# EAGLE board RemovingGround (EAGLE 6.5.0)
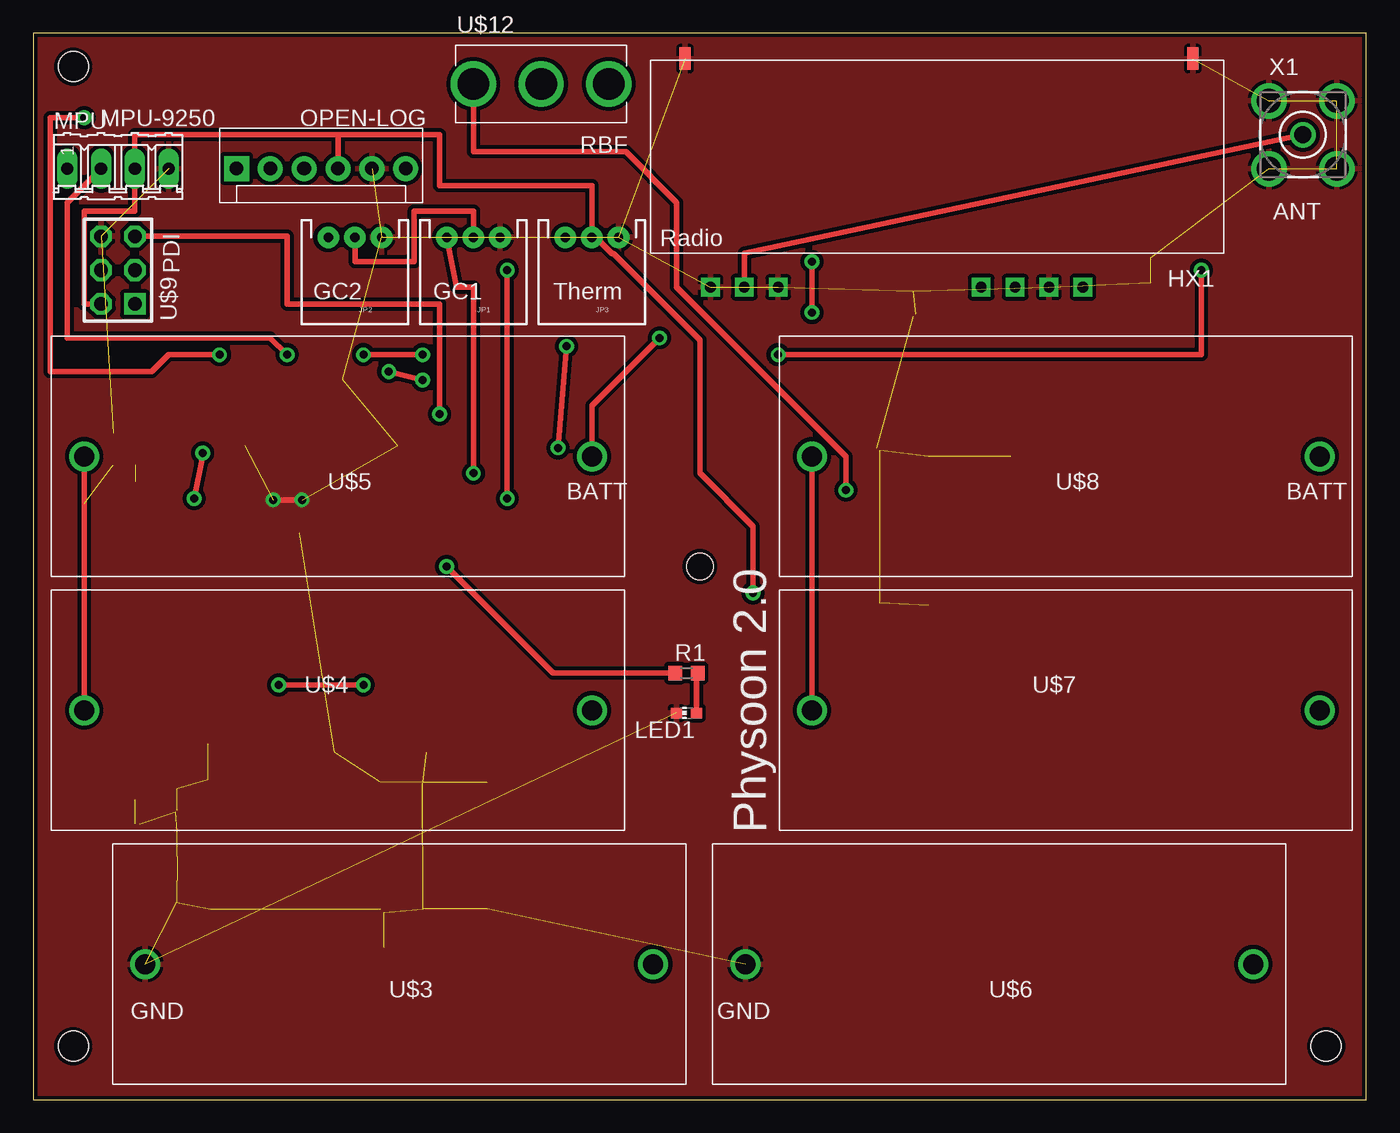
[diagram p0: board, top side]
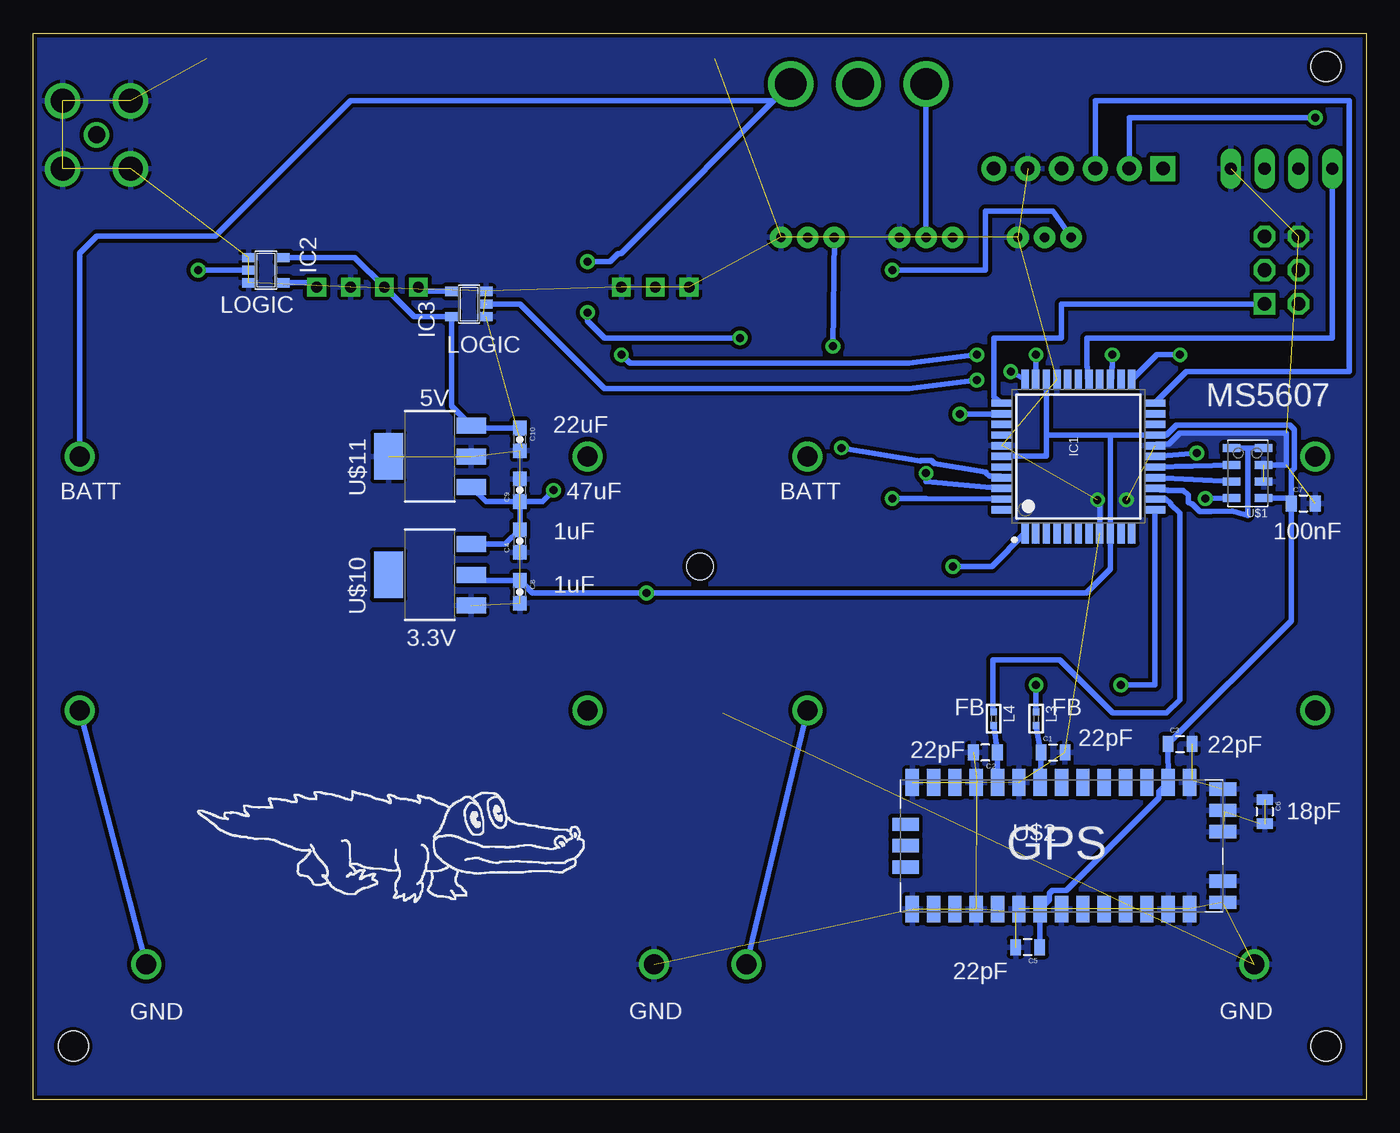
[diagram p1: board, bottom side, seen from below]

Size 100 x 80 mm. Coordinates in mm from the lower left corner, seen from the top.
Outline: 0,0 100,0 100,80 0,80 0,0
Copper layers (1*16): Top 0.035mm / dielectric 1.5mm / Bottom 0.035mm
Design rules "SparkFun": minimum track width 8mil, minimum drill 20mil, track to track 8mil, track to pad 8mil, pad to pad 8mil, via to via 8mil, smd to smd 8mil, copper to edge 8mil, drill to drill 8mil, minimum pad ring 12mil, minimum via ring 10mil, stop-mask expansion 4mil, vias tented up to drill 20mil, thermal gap 10mil
Holes 2.26 mm at 3,4 97,4 3,77.5
Holes 2 mm at 50,40

## Footprints (pad centres in the part's own frame; a part is rotated, then mirrored left to right if it is on the bottom)
0805 = smd 0.8 x 1.2: 1 -0.9,0; 2 0.9,0
0603-CAP = smd 1.1 x 1: 1 -0.85,0; 2 0.85,0
QFP80P1200X1200X120-44N = smd 1.55 x 0.55: 1 -5.75,4; 2 -5.75,3.2; 3 -5.75,2.4; 4 -5.75,1.6; 5 -5.75,0.8; 6 -5.75,0; 7 -5.75,-0.8; 8 -5.75,-1.6; 9 -5.75,-2.4; 10 -5.75,-3.2; 11 -5.75,-4; 23 5.75,-4; 24 5.75,-3.2; 25 5.75,-2.4; 26 5.75,-1.6; 27 5.75,-0.8; 28 5.75,0; 29 5.75,0.8; 30 5.75,1.6; 31 5.75,2.4; 32 5.75,3.2; 33 5.75,4 | smd 0.55 x 1.55: 12 -4,-5.75; 13 -3.2,-5.75; 14 -2.4,-5.75; 15 -1.6,-5.75; 16 -0.8,-5.75; 17 0,-5.75; 18 0.8,-5.75; 19 1.6,-5.75; 20 2.4,-5.75; 21 3.2,-5.75; 22 4,-5.75; 34 4,5.75; 35 3.2,5.75; 36 2.4,5.75; 37 1.6,5.75; 38 0.8,5.75; 39 0,5.75; 40 -0.8,5.75; 41 -1.6,5.75; 42 -2.4,5.75; 43 -3.2,5.75; 44 -4,5.75
SOT23-5 = smd 0.69 x 0.99: 1 -0.95,-1.29; 2 0,-1.29; 3 0.95,-1.29; 4 0.95,1.3; 5 -0.95,1.3
JST-3-PTH = drill 0.7 pad 1.626: 1 -2,-5; 2 0,-5; 3 2,-5
MOLEX-1X6 = drill 1.016 pad 1.88 square: 1 0,0 | drill 1.016 pad 1.88: 2 2.54,0; 3 5.08,0; 4 7.62,0; 5 10.16,0; 6 12.7,0
L0402 = smd 0.5 x 0.5: 1 -0.508,0; 2 0.508,0
CHIP-LED0603 = smd 0.8 x 0.8: A 0,-0.75; C 0,0.75
HX1 = drill 0.8 square: 0V 25.4,-8.89; EN 20.32,-8.89; RFGND1 0,-8.89; RFGND2 5.08,-8.89; RFOUT 2.54,-8.89; TXD 27.94,-8.89; VCC 22.86,-8.89 | smd 0.813 x 1.676: BODYGND1 -1.905,8.255; BODYGND2 36.195,8.255
04P = drill 0.914 long: 1 -3.81,0; 2 -1.27,0; 3 1.27,0; 4 3.81,0
R0603 = smd 1 x 1.1: 1 -0.85,0; 2 0.85,0
MS5611-01BA01 = smd 1.3 x 0.6: 1 -1.2,1.875; 2 -1.2,0.625; 3 -1.2,-0.625; 4 -1.2,-1.875; 5 1.2,-1.875; 6 1.2,-0.625; 7 1.2,0.625; 8 1.2,1.875
M10382-A1 = smd 1 x 2: 1 -1.05,12.1; 2 -2.65,12.1; 3 -4.25,12.1; 18 -1.6,-11.7; 19 0,-11.7; 20 1.6,-11.7; 35 4.25,12.1; 36 2.65,12.1 | smd 2 x 1: 4 -4.75,9.6; 5 -4.75,8; 6 -4.75,6.4; 7 -4.75,4.8; 8 -4.75,3.2; 9 -4.75,1.6; 10 -4.75,0; 11 -4.75,-1.6; 12 -4.75,-3.2; 13 -4.75,-4.8; 14 -4.75,-6.4; 15 -4.75,-8; 16 -4.75,-9.6; 17 -4.75,-11.2; 21 4.75,-11.2; 22 4.75,-9.6; 23 4.75,-8; 24 4.75,-6.4; 25 4.75,-4.8; 26 4.75,-3.2; 27 4.75,-1.6; 28 4.75,0; 29 4.75,1.6; 30 4.75,3.2; 31 4.75,4.8; 32 4.75,6.4; 33 4.75,8; 34 4.75,9.6
CR-123-A_HOLDER = drill 1.5: + -19.05,0; - 19.05,0
AVR-ISP-6 = drill 1.016 square: 1 -2.54,-1.27 | drill 1.016 octagon: 2 -2.54,1.27; 3 0,-1.27; 4 0,1.27; 5 2.54,-1.27; 6 2.54,1.27
SOT-223 = smd 1.2 x 2.2: 1 -2.3,1.1; 2 0,1.1; 3 2.3,1.1 | smd 3.5 x 2.2: 4 0,7.3
ZMCHFL3R = drill 2.375: 1 -5.08,0; 2 0,0; 3 5.08,0
BU-SMA-V = drill 1.27: 1 0,0 | drill 1.778: 2 -2.55,2.55; 3 2.55,2.55; 4 2.55,-2.55; 5 -2.55,-2.55

## Placement (x,y rotation side)
C1  22pF  [0805]  23.5,26.04 0 bottom
C2  22pF  [0805]  28.57,26.04 180 bottom
C3  22pF  [0805]  13.97,26.67 0 bottom
C4  1uF  [0603-CAP]  63.5,41.91 90 bottom
C5  22pF  [0805]  25.4,11.43 180 bottom
C6  18pF  [0805]  7.62,21.59 270 bottom
C7  100nF  [0805]  4.71,44.72 0 bottom
C8  1uF  [0603-CAP]  63.5,38.1 270 bottom
C9  .47uF  [0603-CAP]  63.5,45.72 90 bottom
C10  22uF  [0603-CAP]  63.5,49.53 270 bottom
IC1  [QFP80P1200X1200X120-44N]  21.59,48.26 90 bottom
IC2  74AHC1G125DBV  [SOT23-5]  82.55,62.23 270 bottom
IC3  74AHC1G125DBV  [SOT23-5]  67.31,59.69 90 bottom
JP1  [JST-3-PTH]  33.02,59.69 180 top
JP2  [JST-3-PTH]  24.13,59.69 180 top
JP3  [JST-3-PTH]  41.91,59.69 180 top
JP4  [MOLEX-1X6]  15.24,69.85 0 top
L3  FB_0402  [L0402]  24.77,28.57 270 bottom
L4  FB_0402  [L0402]  27.94,28.57 270 bottom
LED1  [CHIP-LED0603]  49,29 90 top
M1  HX1  [HX1]  50.8,69.85 0 top
MPU  [04P]  6.35,69.85 0 top
R1  220  [R0603]  49,32 0 top
U$1  MS5611QFN  [MS5611-01BA01]  8.89,46.99 180 bottom
U$2  M10382-A1  [M10382-A1]  22.86,19.05 270 bottom
U$3  123_BATTERY_HOLDERCR-123-A  [CR-123-A_HOLDER]  27.46,10.16 180 top
U$4  123_BATTERY_HOLDERCR-123-A  [CR-123-A_HOLDER]  22.86,29.21 0 top
U$5  123_BATTERY_HOLDERCR-123-A  [CR-123-A_HOLDER]  22.86,48.26 180 top
U$6  123_BATTERY_HOLDERCR-123-A  [CR-123-A_HOLDER]  72.47,10.16 180 top
U$7  123_BATTERY_HOLDERCR-123-A  [CR-123-A_HOLDER]  77.47,29.21 0 top
U$8  123_BATTERY_HOLDERCR-123-A  [CR-123-A_HOLDER]  77.47,48.26 180 top
U$9  AVR-PDIVERT  [AVR-ISP-6]  6.35,62.23 90 top
U$10  AZ1117EH3.3  [SOT-223]  66.04,39.37 90 bottom
U$11  LM2940-5  [SOT-223]  66.04,48.26 90 bottom
U$12  CKN10160-ND  [ZMCHFL3R]  38.1,76.2 0 top
X1  BU-SMA-V  [BU-SMA-V]  95.25,72.39 0 top

## Library data of the parts
C1-C10 JP4 = SparkFun
IC1 = xmega-a4
IC2 IC3 = 74xx-little-us
JP1-JP3 = SparkFun-Connectors
L3 L4 = rc-master-smd
LED1 = led
M1 = trackuino
MPU = con-amp-quick; OC_FARNELL: unknown; OC_NEWARK: unknown
R1 = resistor
U$1-U$8 U$12 = SHC
U$9 = avr-7
U$10 U$11 = Physoon
X1 = con-coax; OC_FARNELL: unknown; OC_NEWARK: unknown

## Nets
5V: C10.1 IC2.5 IC3.5 M1.VCC U$11.3
BATT: C4.2 C9.1 JP1.2 JP2.2 U$10.3 U$11.1 U$12.1
EN-5V: IC3.4 M1.EN
GC1: IC1.42 JP1.3
GC2: IC1.43 JP2.3
GND: C1.2 C2.2 C3.2 C4.1 C5.2 C6.1 C6.2 C7.2 C8.2 C9.2 C10.2 IC1.8 IC1.18 IC1.30 IC1.38 IC2.1 IC2.3 IC3.1 IC3.3 JP1.1 JP2.1 JP3.1 JP4.5 LED1.C M1.0V M1.BODYGND1 M1.BODYGND2 M1.RFGND1 M1.RFGND2 MPU.4 U$1.2 U$1.3 U$2.1 U$2.2 U$2.3 U$2.4 U$2.12 U$2.14 U$2.17 U$2.21 U$2.24 U$2.26 U$2.28 U$2.33 U$2.34 U$2.35 U$2.36 U$3.- U$6.- U$9.6 U$10.1 U$11.2 U$11.4 X1.2 X1.3 X1.4 X1.5
LED: IC1.1 R1.1
MISOC: IC1.16 U$1.6
MOSIC: IC1.15 U$1.7
N$1: C1.1 L3.2 U$2.11
N$2: C2.1 L4.2 U$2.13
N$4: U$3.+ U$4.-
N$5: M1.RFOUT X1.1
N$6: U$4.+ U$5.-
N$7: U$5.+ U$8.+ U$12.3
N$8: U$6.+ U$7.-
N$9: U$7.+ U$8.-
N$10: LED1.A R1.2
PDI-CLK: IC1.35 U$9.5
PDI-DATA: IC1.34 U$9.1
RXC: IC1.12 L3.1
RXD: IC1.22 JP4.3
RXE: IC1.32 IC2.2
SCLKC: IC1.17 U$1.8
SCLKD: IC1.27 MPU.1
SDID: IC1.25 MPU.2
SSC: IC1.14 U$1.4 U$1.5
THERM: IC1.41 JP3.3
TXC: IC1.13 L4.1
TXD: IC1.23 JP4.2
TXD-5V: IC2.4 M1.TXD
TXE: IC1.33 IC3.2
VCC: C3.1 C5.1 C7.1 C8.1 IC1.9 IC1.19 IC1.31 IC1.39 JP3.2 JP4.4 MPU.3 U$1.1 U$2.5 U$2.27 U$9.2 U$10.2

## Tracks (layer width: path | path; a pad name or v marks a point on that pad's centre or on a via)
5V
  Bottom 0.406: C10.1 66.96,50.38 U$11.3 68.61,52.03 IC3.5 71.44,58.74 M1.VCC 75.88,63.18 IC2.5
BATT  (via drill 0.6)
  Top 0.406: JP1.2 33.02,66.67 28.57,66.67 28.57,62.87 24.13,62.87 JP2.2 | v60.96,45.72 60.96,48.26 48.26,60.96 48.26,67.31 44.45,71.12 33.02,71.12 U$12.1
  Bottom 0.406: U$12.1 JP1.2 | U$10.3 64.59,41.67 C4.2 C9.1 | C9.1 66.05,44.87 U$11.1 | C9.1 61.81,44.87 v60.96,45.72
EN-5V
  Bottom 0.406: IC3.4 70.8,60.64 M1.EN
GC1  (via drill 0.6)
  Top 0.406: v33.02,46.99 33.02,60.96 31.75,60.96 JP1.3
  Bottom 0.406: IC1.42 33.02,46.35 v33.02,46.99
GC2  (via drill 0.6)
  Top 0.406: v35.56,45.09 v35.56,62.23
  Bottom 0.406: IC1.43 33.02,45.09 v35.56,45.09 | v35.56,62.23 28.57,62.23 28.57,66.67 23.5,66.67 JP2.3
GND  (via drill 0.6)  (55 unrouted)
  Top 0.406: v20.15,45 v18,45
  Bottom 0.406: 10.79,16.43 U$2.36 | 29.21,23.85 U$2.14 29.21,23.75 | 26.04,23.82 U$2.12 | 13.07,23.99 U$2.4 | 26.3,14.06 U$2.26 | C6.2 7.99,20.69 | 10.65,21.59 U$2.2 | C6.1 7.99,22.49 | 63.28,48.9 C10.2 | 66.22,58.94 IC3.1 | U$1.3 6,47.62 6,50 14,50 14.82,49.18 15.72,49.18 IC1.18 | IC1.8 19.99,44.99 20,45 v20.15,45
  pour Top (isolate 0.305): 0,80.01 100,80.01 100,0 0,0
  pour Bottom (isolate 0.305): 0,80 100,80 100,0 0,0
LED  (via drill 0.6)
  Top 0.406: R1.1 39,32 v31,40
  Bottom 0.406: v31,40 28.1,40 IC1.1
MISOC
  Bottom 0.406: U$1.6 IC1.16
MOSIC
  Bottom 0.406: U$1.7 IC1.15
N$1
  Bottom 0.406: U$2.11 C1.1 L3.2
N$2
  Bottom 0.406: U$2.13 C2.1 L4.2
N$4
  Bottom 0.406: U$3.+ U$4.-
N$5
  Top 0.406: X1.1 53.34,63.5 M1.RFOUT
N$6
  Top 0.406: U$4.+ U$5.-
N$7  (via drill 0.6)
  Top 0.406: U$5.+ 41.91,52.07 v46.99,57.15 | v58.42,59.05 v58.42,62.87
  Bottom 0.406: U$8.+ 96.52,63.5 95.25,64.77 86.36,64.77 76.2,74.93 44.45,74.93 U$12.3 55.91,63.48 56.13,63.48 56.74,62.87 v58.42,62.87 | v46.99,57.15 57.15,57.15 58.42,58.42 v58.42,59.05
N$8
  Bottom 0.406: U$7.- U$6.+
N$9
  Top 0.406: U$7.+ U$8.-
N$10
  Top 0.406: R1.2 49.75,32 LED1.A
PDI-CLK  (via drill 0.6)
  Top 0.406: U$9.5 19.05,64.77 19.05,59.69 30.48,59.69 v30.48,51.44
  Bottom 0.406: v30.48,51.44 27.36,51.44 IC1.35
PDI-DATA
  Bottom 0.406: U$9.1 22.86,59.69 22.86,57.15 27.94,57.15 27.94,52.7 IC1.34
RXC  (via drill 0.6)
  Top 0.406: v18.41,31.11 v24.77,31.11
  Bottom 0.406: IC1.12 15.88,31.11 v18.41,31.11 | v24.77,31.11 L3.1
RXD
  Bottom 0.406: JP4.3 20.32,74.93 1.27,74.93 1.27,54.61 13.49,54.61 IC1.22
RXE  (via drill 0.6)
  Top 0.406: v24.77,55.88 v29.21,55.88 | v55.88,55.88 87.63,55.88 v87.63,62.23
  Bottom 0.406: IC1.32 v24.77,55.88 | v29.21,55.88 34.29,55.24 55.24,55.24 v55.88,55.88 | v87.63,62.23 IC2.2
SCLKC  (via drill 0.6)
  Top 0.406: v12.06,45.09 12.7,48.26 v12.71,48.51
  Bottom 0.406: U$1.8 v12.06,45.09 | v12.71,48.51 IC1.17
SCLKD
  Bottom 0.406: MPU.1 2.54,57.15 20.95,57.15 20.95,55 20.91,54.95 20.91,54.13 IC1.27
SDID  (via drill 0.6)
  Top 0.406: MPU.2 2.54,67.31 2.54,57.15 17.78,57.15 v19.05,55.88
  Bottom 0.406: v19.05,55.88 19.05,54.98 19.07,54.95 19.07,54.13 IC1.25
SSC
  Bottom 0.406: U$1.5 8.89,48.87 | 8.89,48.87 U$1.4 | 8.89,48.87 8.89,43.81 10.03,44.15 11.67,44.12 12.46,44.12 13.03,44.69 13.36,44.79 13.36,45.34 13.72,45.7 14.36,45.7 14.37,45.7 14.61,45.7 14.85,45.7 14.9,45.74 15.44,45.74 IC1.14
THERM  (via drill 0.6)
  Top 0.406: v40.01,56.52 v39.37,48.9
  Bottom 0.406: JP3.3 v40.01,56.52 | v39.37,48.9 33.46,47.91 33.42,47.95 32.62,47.95 32.41,47.73 28.52,47.09 | 28.52,47.09 28.52,47.02 | 28.52,47.09 28.52,47.02 | 28.52,47.02 28.28,46.78 27.46,46.78 IC1.41
TXC
  Bottom 0.406: IC1.13 15.02,45.06 14.66,44.7 14.66,44.66 14,44 14,30 15,29 19,29 23,33 28,33 28,29.14 L4.1
TXD  (via drill 0.6)
  Top 0.406: v3.81,73.66 1.27,73.66 1.27,54.61 8.89,54.61 10.16,55.88 v13.97,55.88
  Bottom 0.406: JP4.2 17.78,73.66 v3.81,73.66 | v13.97,55.88 15.72,55.88 IC1.23
TXD-5V
  Bottom 0.406: IC2.4 79.06,61.28 M1.TXD
TXE  (via drill 0.6)
  Top 0.406: v26.67,54.61 v29.21,53.98
  Bottom 0.406: IC1.33 v26.67,54.61 | v29.21,53.98 34.29,53.34 57.15,53.34 63.5,59.69 IC3.2
VCC  (via drill 0.6)
  Top 0.406: JP4.4 22.86,72.39 | 22.86,72.39 7.62,72.39 MPU.3 7.62,66.67 3.81,66.67 3.81,59.69 U$9.2 | 22.86,72.39 30.48,72.39 30.48,68.58 41.91,68.58 JP3.2 42.19,64.69 43.41,63.47 43.53,63.47 50,57 50,47 54,43 v54,38
  Bottom 0.406: C5.1 24.5,14.26 U$2.27 23.77,14.99 23.77,15.47 23.53,15.71 22.48,15.71 15.55,22.63 15.55,23.11 U$2.5 C3.1 5.62,35.92 C7.1 | 27.23,48.15 IC1.39 27.34,48.3 24,48.3 24,49.86 23.99,49.86 | U$10.2 66.72,38.95 C8.1 62.55,38 v54,38 21,38 19.19,39.81 IC1.9 19.19,49.86 | 19.19,49.86 IC1.19 15,49.86 14.25,50.61 5.75,50.61 5.39,50.25 5.39,47.36 5.62,47.14 C7.1 | 19.19,49.86 23.99,49.86 | 23.99,49.86 IC1.31 | U$1.1 5.62,45.12 C7.1

## Text on the board
Dimension: C:/Users/cw0063/Downloads/croc.bmp
tPlace: MPU-9250 | OPEN-LOG | RBF | ANT | Radio | PDI | GC2 | GC1 | Therm | BATT | BATT | Physoon 2.0 | GND | GND | /storage/Chrome/croc.bmp
bPlace: LOGIC | LOGIC | MS5607 | 5V | 22uF | BATT | 47uF | BATT | 100nF | 1uF | 1uF | 3.3V | FB | FB | 22pF | 22pF | 22pF | 18pF | GPS | 22pF | GND | GND | GND
209bmp: /storage/Chrome/croc.bmp